# Altium PCB ArduinoFOC.PcbDoc
Units mm, origin at the board's own origin, x right, y up, seen from the top; angles counter-clockwise.
Board outline 68.05 x 53.25 mm, 2 copper layers (Top Layer, Bottom Layer), stack 1.671 mm thick; 45 components, 51 nets, 169 pads, 62 vias.
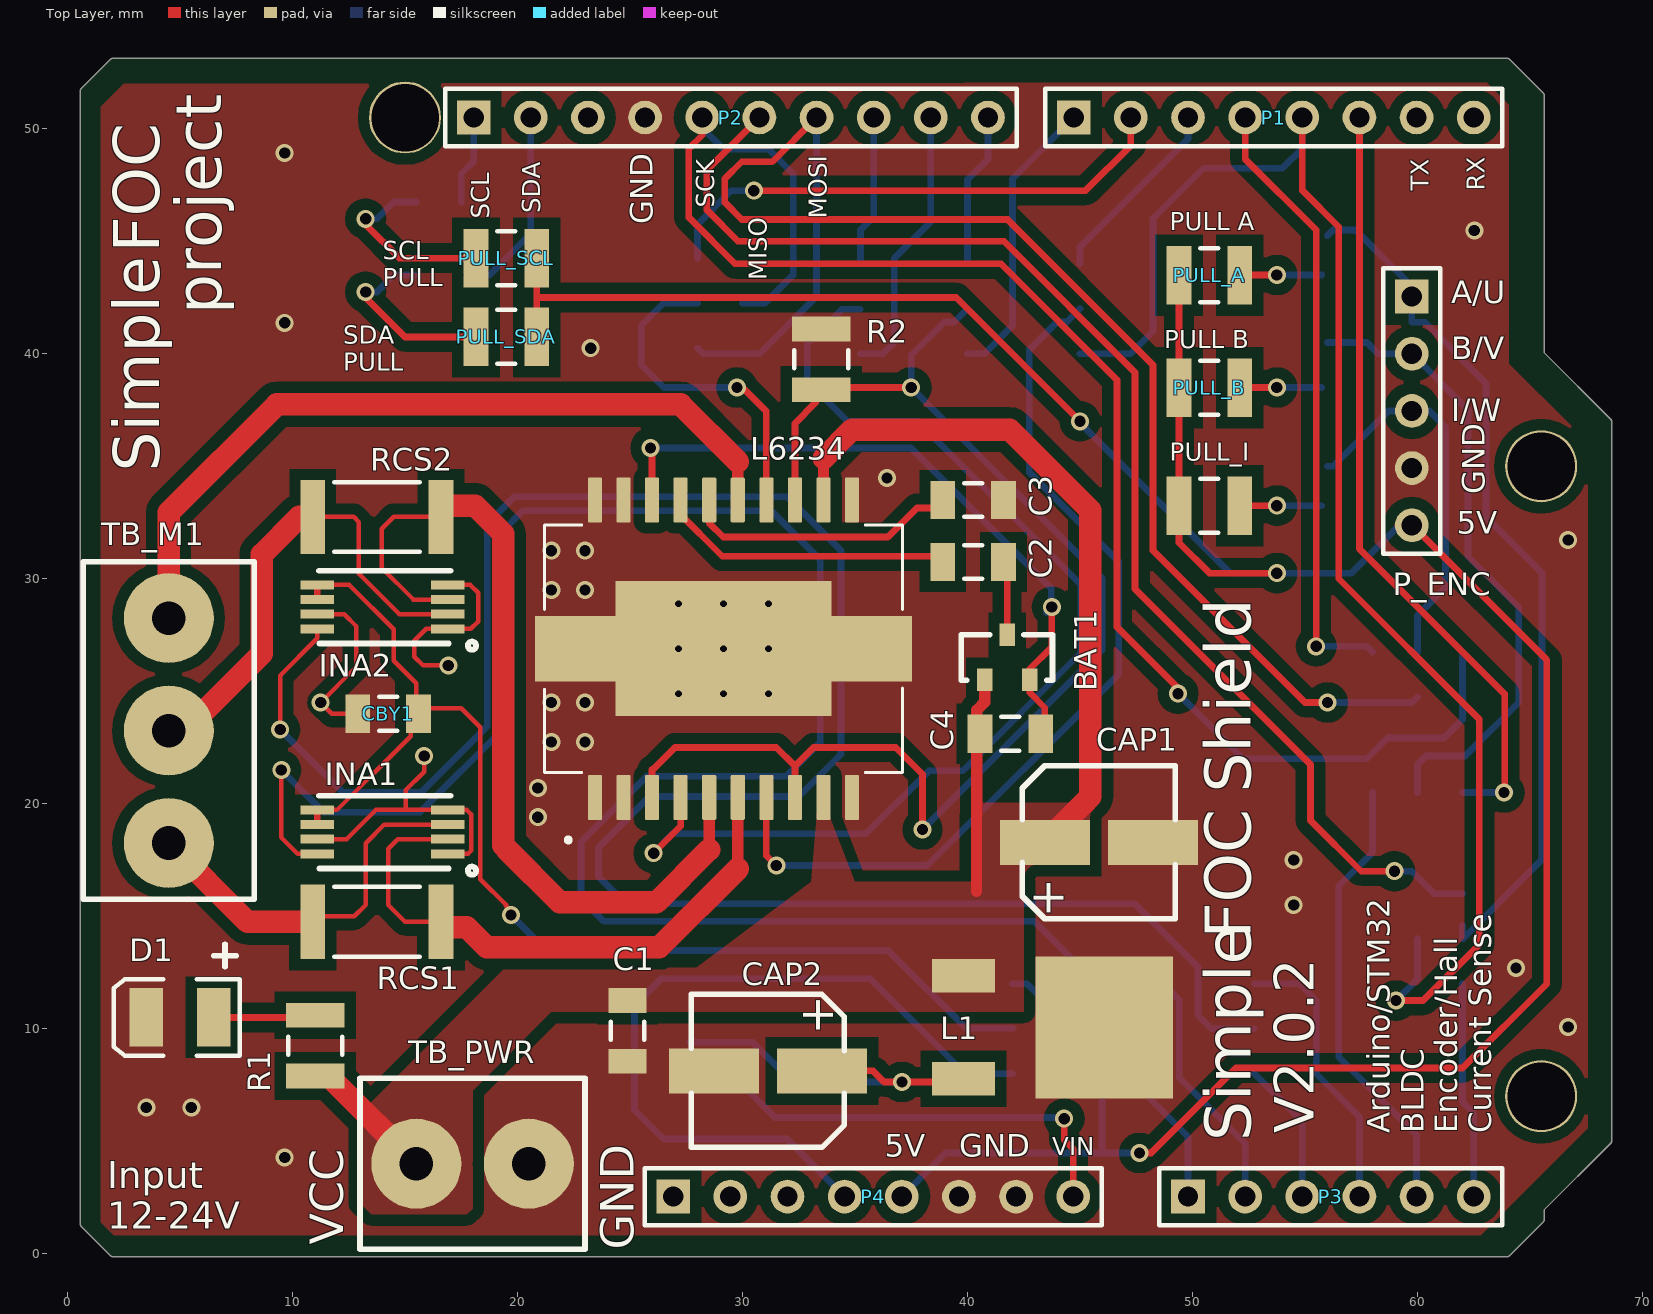
[diagram p0: Top Layer view]
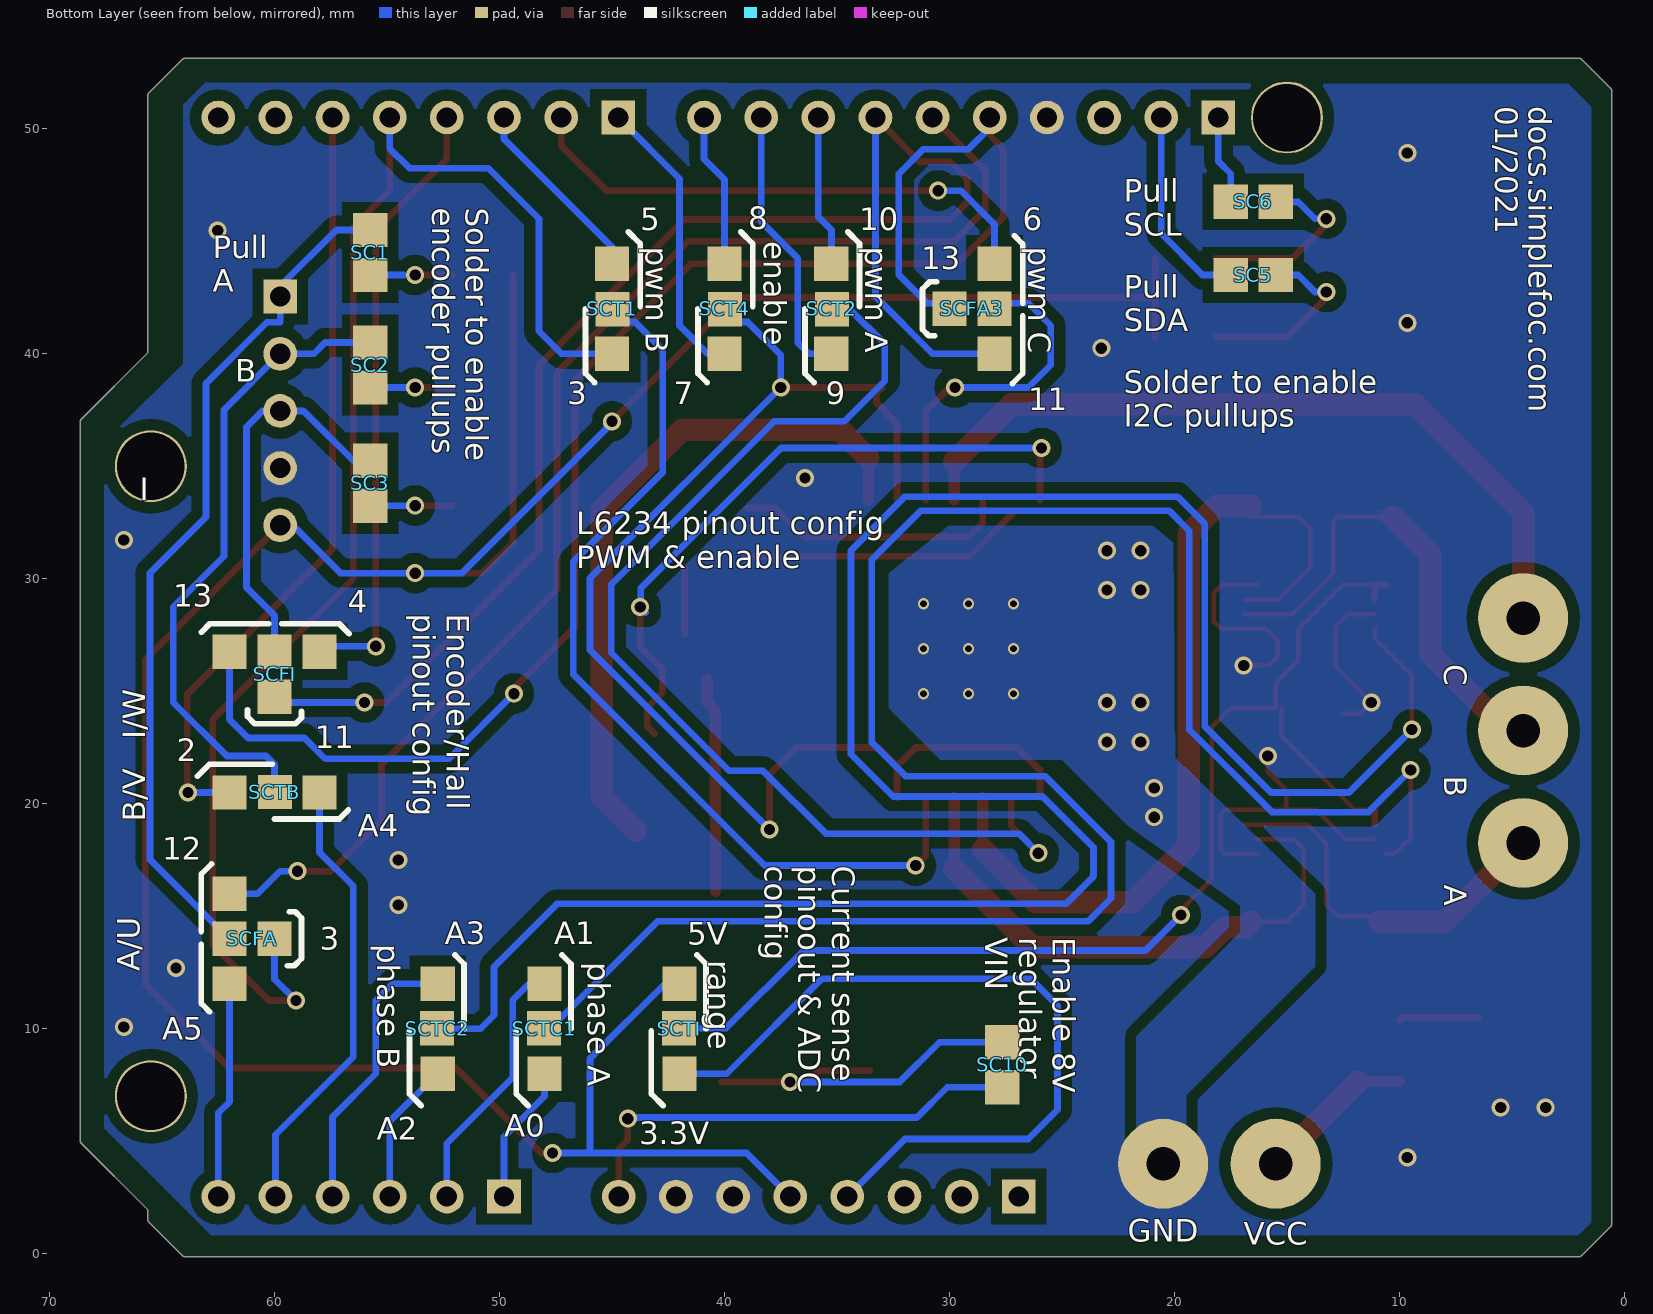
[diagram p1: Bottom Layer view, seen from below]

## Layer stack, top to bottom
Top Solder: solder mask 0.0102, Solder Resist, Dk 3.5
Top Layer: signal copper 0.0356
Dielectric 1: dielectric 1.6, FR-4, Dk 4.8
Bottom Layer: signal copper 0.0356
Bottom Solder: solder mask 0.0102, Solder Resist, Dk 3.5

## Board outline
0.785,1.035 cw(c0.875,1.125) 0.784,1.035 0.61,1.21 1.91,-0.09 ccw(c2,0) 2,-0.127 64,-0.127 ccw(c64,0) 64.09,-0.09 65.59,1.41 ccw(c65.5,1.5) 65.627,1.5 65.627,1.947 68.59,4.91 68.59,4.909 ccw(c68.5,5) 68.627,5 68.627,37 ccw(c68.5,37) 68.59,37.091 68.59,37.09 65.627,40.053 65.627,51.5 ccw(c65.5,51.5) 65.59,51.59 64.09,53.09 ccw(c64,53) 64,53.127 2,53.127 ccw(c2,53) 1.909,53.089 1.91,53.09 0.61,51.79 ccw(c0.7,51.7) 0.573,51.7 0.573,1.3 ccw(c0.7,1.3)

## Design rules (kind name [scope] priority, off if disabled: settings)
Clearance [All] p1: gap=0.5 ignorepadtopadclearanceinfootprint=FALSE except(0.2: Arc-Arc Arc-Track Arc-SMDPad Track-Track Track-SMDPad SMDPad-SMDPad)
ComponentClearance [InComponent('P_MOT') vs InComponent('TB_M1')] p1: gap=0.254 collisioncheckmode=3 verticalgap=0.254 showdistances=FALSE
NetsToIgnore [All] p1:
PolygonConnect PolygonConnect_2 [InNet('VCC')] p1: thpad.connectstyle=Direct thpad.reliefconductorwidth=0.254 thpad.reliefentries=4 thpad.polygonreliefangle="90 Angle" thpad.airgapwidth=0.254 smdpad.connectstyle=Direct smdpad.reliefconductorwidth=0.254 smdpad.reliefentries=4 smdpad.polygonreliefangle="90 Angle" smdpad.airgapwidth=0.254 via.connectstyle=Relief via.reliefconductorwidth=0.254 via.reliefentries=4 via.polygonreliefangle="90 Angle" via.airgapwidth=0.254
PolygonConnect PolygonConnect_1 [InNet('GND')] p2: connectstyle=Direct reliefconductorwidth=0.254 reliefentries=4 polygonreliefangle="90 Angle" airgapwidth=0.254
PolygonConnect [All] p3: connectstyle=Relief reliefconductorwidth=0.254 reliefentries=4 polygonreliefangle="90 Angle" airgapwidth=0.254
RoutingVias [All] p1: holewidth=0.5 width=0.8 viastyle="Through Hole" minholewidth=0.3 minwidth=0.5 maxholewidth=0.711 maxwidth=1.27
SolderMaskExpansion [All] p1: expansion=0.102
UnpouredPolygon [All] p1: allowunpoured=TRUE allowshelved=TRUE
Width Mot_line [InNetClass('Mot')] p1: maxlimit=1 minlimit=0.1 preferedwidth=0.2 minimp=50.000000 maximp=50.000000 favimp=50.000000
Width PWR_line [InNet('VCC')] p2: maxlimit=1 minlimit=0.2 preferedwidth=0.5 minimp=50.000000 maximp=50.000000 favimp=50.000000
Width GND_line [InNet('GND')] p3: maxlimit=1.2 minlimit=0.1 preferedwidth=0.2 minimp=50.000000 maximp=50.000000 favimp=50.000000
Width [All] p4: maxlimit=1 minlimit=0.2 preferedwidth=0.3 minimp=50.000000 maximp=50.000000 favimp=50.000000
28 further rules are at their usual default settings.

## Classes and differential pairs
net class Mot: NetINA1_2 NetINA1_3 NetINA2_2 NetINA2_3 NetL6234_15

## Components (designator, comment, footprint, x,y, rotation, side; value= is the part's Value field where it differs from the comment)
BAT1 "BAT54S" BAT54s 42.766,27.516 r270 top
C1 "Cap Semi" C1206 24.892,9.906 r270 top value=100nF
C2 "Cap Semi" C1206 40.25,30.75 r0 top value=10nF
C3 "Cap Semi" C1206 40.25,33.5 r0 top value=1uF
C4 "Cap Semi" C1206 41.91,23.114 r0 top value=220nF
CAP1 "EEH-ZA1E101XP" EEH-ZA1E101XP 49.234,21.688 r180 top
CAP2 "VZH100M1HTR-0606" EEH-ZA1E101XP 27.728,4.728 r0 top
CBY1 "Cap Semi" C1206 14.25,24 r0 top value=0.1uF
D1 "LED3" 3.5X2.8X1.9 5,10.5 r180 top
INA1 "INA240" INA240 14,18.75 r90 top
INA2 "INA240" INA240 14,28.75 r90 top
L1 "l7805" L7805 43.475,10.2 r0 top
L6234 "L6234PD013TR" SOIC127P1420X360-21N 29.155,26.89 r0 top
P1 "Header 8" HDR1X8 44.72,50.5 r0 top locked
P2 "Header 10" HDR1X10 18.05,50.5 r0 top
P3 "Header 6" HDR1X6 49.8,2.54 r0 top locked
P4 "Header 8" HDR1X8 26.92,2.54 r0 top locked
P_ENC "Header 5" HDR1X5 59.75,42.54 r270 top
PULL_A "Res3" 14-1210 50.75,43.5 r0 top value=3.3K
PULL_B "Res3" 14-1210 50.75,38.5 r0 top value=3.3K
PULL_I "Res3" 14-1210 50.75,33.25 r0 top value=3.3K
PULL_SCL "Res3" 14-1210 19.5,44.25 r180 top value=4.7K
PULL_SDA "Res3" 14-1210 19.5,40.75 r180 top value=4.7K
R1 "Res3" 14-1210 11,9.25 r270 top value=750Ohm
R2 "Res3" 14-1210 33.5,39.75 r270 top value=4.7K
RCS1 "Res3" RESC6332 13.75,14.75 r180 top value=10mOhm
RCS2 "Res3" RESC6332 13.75,32.75 r180 top value=10mOhm
SC1 "solder_connection" solder_connection 55.75,45.5 r270 bottom
SC2 "solder_connection" solder_connection 55.75,40.5 r270 bottom
SC3 "solder_connection" solder_connection 55.75,35.25 r270 bottom
SC5 "solder_connection" solder_connection 17.5,43.5 r180 bottom
SC6 "solder_connection" solder_connection 17.5,46.75 r180 bottom
SC10 "solder_connection" solder_connection 27.65,9.4 r270 bottom
SCFA "solder_connection_four" solder_connection_four 62,14 r90 bottom
SCFA3 "solder_connection_four" solder_connection_four 28,42 r270 bottom
SCFI "solder_connection_four" solder_connection_four 60,26.75 r180 bottom
SCT1 "solder_connection_tripple" solder_connection_tripple 45,42 r270 bottom
SCT2 "solder_connection_tripple" solder_connection_tripple 35.25,42 r270 bottom
SCT4 "solder_connection_tripple" solder_connection_tripple 40,42 r270 bottom
SCTB "solder_connection_tripple" solder_connection_tripple 60,20.5 r180 bottom
SCTC1 "solder_connection_tripple" solder_connection_tripple 48,10 r90 bottom
SCTC2 "solder_connection_tripple" solder_connection_tripple 52.75,10 r90 bottom
SCTI "3.3 or 5 v" solder_connection_tripple 42,10 r90 bottom
TB_M1 "TB002-500-03BE" TB002-500-03BE 4.5,18.25 r90 top
TB_PWR "TB002-500-02BE" TB002-500-02BE 20.5,4 r180 top

## Footprints (in the part's own frame and the unit in brackets; to place one, negate y for a bottom-side part, rotate by r counter-clockwise, add the part's x,y. Pads: shape width x height; smd on the part's side, far side on the other; paste and mask are expansions set on the pad)
3.5X2.8X1.9 [mm] "SM LED; 2 C-Bend Leads; Body 3.5 x 2.8 x 1.9 mm, inc leads (LxWxH typ)"
  rect 1.5x2.6 smd: 1(-1.5,0) 2(1.5,0)
  silkscreen extent -2.65,-1.7 2.95,1.7
14-1210 [mm] "Chip Resistor, Body 3.2x2.5mm, IPC High Density"
  rect 1.1x2.6 smd: 1(-1.35,0) 2(1.35,0)
  silkscreen extent -0.4,-1.2 0.4,1.2, body extent -1.68,-1.32 1.68,1.32, height 0.9
BAT54s [mm]
  rect 1x0.7 smd: 1(2,-2) 2(2,0) 3(0,-1)
  silkscreen extent 0,-3.05 2.03,1.02, body extent -0.46,-2.48 2.46,0.44, height 1
C1206 [mm] "Chip Capacitor, Body 3.2x1.6mm, IPC High Density"
  rect 1.1x1.7 smd: 1(-1.35,0) 2(1.35,0)
  silkscreen extent -0.4,-0.75 0.4,0.75, body extent -1.7,-0.9 1.7,0.9, height 1.3
EEH-ZA1E101XP [mm]
  rect 4x2 smd: 1(1,3.4) 2(5.8,3.4)
  silkscreen extent 0,0 6.8,6.8, body extent -0.3,0.2 7,6.8, height 7.7
HDR1X5 [mm] "Connector; Header; 5 Position"
  rect 1.5x1.5 hole 0.9: 1(0,0)
  round 1.5 hole 0.9: 2(2.54,0) 3(5.08,0) 4(7.62,0) 5(10.16,0)
  silkscreen extent -1.27,-1.27 11.43,1.27
HDR1X6 [mm] "Connector; Header; 6 Position"
  rect 1.5x1.5 hole 0.9: 1(0,0)
  round 1.5 hole 0.9: 2(2.54,0) 3(5.08,0) 4(7.62,0) 5(10.16,0) 6(12.7,0)
  silkscreen extent -1.27,-1.27 13.97,1.27
HDR1X8 [mm] "Connector; Header; 8 Position"
  rect 1.5x1.5 hole 0.9: 1(0,0)
  round 1.5 hole 0.9: 2(2.54,0) 3(5.08,0) 4(7.62,0) 5(10.16,0) 6(12.7,0) 7(15.24,0) 8(17.78,0)
  silkscreen extent -1.27,-1.27 19.05,1.27
HDR1X10 [mm] "Connector; Header; 10 Position"
  rect 1.5x1.5 hole 0.9: 1(0,0)
  round 1.5 hole 0.9: 2(2.54,0) 3(5.08,0) 4(7.62,0) 5(10.16,0) 6(12.7,0) 7(15.24,0) 8(17.78,0) 9(20.32,0) 10(22.86,0)
  silkscreen extent -1.27,-1.27 24.13,1.27
INA240 [mm]
  rect 0.4x1.5 smd mask+0.05: 1(-0.975,-2.9) 2(-0.325,-2.9) 3(0.325,-2.9) 4(0.975,-2.9) 5(0.975,2.9) 6(0.325,2.9) 7(-0.325,2.9) 8(-0.975,2.9)
  silkscreen extent -1.91,-4.16 1.6,2.83, body extent -1.5,-3.3 1.5,3.3, height 1.2
L7805 [mm] "l7805"
  rect 2.8x1.5 smd: 1(-3.65,2.15) 3(-3.65,-2.422)
  rect 6.1x6.3 smd: 2(2.6,-0.15)
  body extent -4.66,-3.3 5.06,3.1, height 2.3
RESC6332 [mm] "Chip Resistor, Body 6.3x3.2mm, IPC High Density"
  rect 1.1x3.3 smd: 1(-2.85,0) 2(2.85,0)
  silkscreen extent -1.9,-1.55 1.9,1.55, body extent -3.22,-1.68 3.22,1.68, height 0.9
SOIC127P1420X360-21N [mm]
  rrect16% 0.63x1.99 smd: 1(-5.715,-6.61) 2(-4.445,-6.61) 3(-3.175,-6.61) 4(-1.905,-6.61) 5(-0.635,-6.61) 6(0.635,-6.61) 7(1.905,-6.61) 8(3.175,-6.61) 9(4.445,-6.61) 10(5.715,-6.61) 11(5.715,6.61) 12(4.445,6.61) 13(3.175,6.61) 14(1.905,6.61) 15(0.635,6.61) 16(-0.635,6.61) 17(-1.905,6.61) 18(-3.175,6.61) 19(-4.445,6.61) 20(-5.715,6.61)
  rect 9.6x6 smd paste-6: 21(0,0)
  rect 4x2.9 smd paste-3: 22(-6.375,0) 23(6.375,0)
  silkscreen extent -7.95,-8.6 7.95,5.5, body extent -8.26,-7.73 7.8,8.27, height 3.5
solder_connection [mil]
  rect 60x60 smd: 1(0,0) 2(78.74,0)
solder_connection_four [mil]
  rect 60x60 smd: 1(0,0) 2(78.74,0) 3(-78.74,0) 4(0,-78.74)
  silkscreen extent -128,-126 131,49
solder_connection_tripple [mil]
  rect 60x60 smd: 1(0.98,0.98) 2(78.74,0) 3(-78.74,0)
  Top Layer region: -28.54,34.45
  silkscreen extent -135,-46 129,49
TB002-500-02BE [mm] "TB002-500-02BE"
  round 4 hole 1.5: 1(0,0) 2(5,0)
  silkscreen extent -2.5,-3.8 7.5,3.8, body extent -2.5,-4.4 7.5,4.6, height 13.55
TB002-500-03BE [mm] "TB002-500-03BE"
  round 4 hole 1.5: 1(0,0) 2(5,0) 3(10,0)
  Top Layer lines w0.254: 0,0 0,-0.08
  silkscreen extent -2.5,-3.8 12.5,3.8, body extent -2.57,-5.2 13.17,4.6, height 13.8

## Part data
BAT1: Supplier Part Number 1=512-BAT54S, Supplier 1=Mouser
C1 C2 C3 C4 CBY1: "Capacitor (Semiconductor SIM Model)", LatestRevisionDate=29-May-2009, LatestRevisionNote="IPC-7351 Footprint Added.", PackageDescription="Chip Capacitor", PackageReference=C1206, Published=8-Jun-2000, Publisher="Altium Limited"
CAP1: Supplier Part Number 1=667-EEH-ZA1E101XP, Supplier 1=Mouser
CAP2: library part EEH-ZA1E101XP, Supplier Part Number 1=667-EEH-ZA1E101XP, Supplier 1=Mouser
D1: "Typical BLUE SiC LED", DatasheetVersion=16-Apr-2002, LatestRevisionDate=17-Dec-2003, LatestRevisionNote="PCB Footprint replaced.", PackageDescription="SM LED; 2 C-Bend Leads; Body 3.5 x 2.8 x 1.9 mm, inc leads (LxWxH typ)", PackageReference=3.5X2.8X1.9, PackageVersion=16-Apr-2002, Published=8-Jun-2000, Publisher="Altium Limited"
INA1 INA2: Supplier Part Number 1=595-INA240A2PWR, Supplier 1=Mouser
L6234: "Motor Driver BiCDMOS Parallel PowerSO-20", Package="SO-20 STMicroelectronics", Digi-Key_Part_Number=497-5352-1-ND, Digi-Key_Purchase_URL=https://www.digikey.com/product-detail/en/stmicroelectronics/L6234PD013TR/497-5352-1-ND/1154483?utm_source=snapeda&utm_medium=aggregator&utm_campaign=symbol, MF=STMicroelectronics, MP=L6234PD013TR, SnapEDA_Link=https://www.snapeda.com/parts/L6234PD013TR/STMicroelectronics/view-part/75337/?ref=snap
P1 P4: "Header, 8-Pin", LatestRevisionDate=17-Jul-2002, LatestRevisionNote="Re-released for DXP Platform.", Publisher="Altium Limited"
P2: "Header, 10-Pin", LatestRevisionDate=17-Jul-2002, LatestRevisionNote="Re-released for DXP Platform.", Publisher="Altium Limited"
P3: "Header, 6-Pin", LatestRevisionDate=17-Jul-2002, LatestRevisionNote="Re-released for DXP Platform.", Publisher="Altium Limited"
P_ENC: "Header, 5-Pin", LatestRevisionDate=17-Jul-2002, LatestRevisionNote="Re-released for DXP Platform.", Publisher="Altium Limited"
PULL_A PULL_B PULL_I PULL_SCL PULL_SDA R1 R2 RCS1 RCS2: "Resistor", LatestRevisionDate=29-May-2009, LatestRevisionNote="IPC-7351 Footprint Added.", PackageDescription="Chip Resistor", PackageReference=J1-0603, Published=8-Jun-2000, Publisher="Altium Limited"
SCTI: library part solder_connection_tripple
TB_M1: Supplier Part Number 1=490-TB002-500-03BE, Supplier 1=Mouser
TB_PWR: Supplier Part Number 1=490-TB002-500-02BE, Supplier 1=Mouser

## Free pads (board coordinates)
  round 3.2 hole 3: T1(15,50.5) T2(65.5,35) T3(65.5,7)

## Via types
v1: diameter 0.8, hole 0.5, Top Layer to Bottom Layer, 53 vias
v2: diameter 0.5, hole 0.3, Top Layer to Bottom Layer, 9 vias

## Nets (pads, with @x,y where several pads share a name; then routed paths per layer and width w, separated by ;. In a path a pad name is that pad's centre, name@x,y a point inside that pad or via, vN(x,y) a via of type N, cw(c..) or ccw(c..) an arc to the next point about the centre after c; other vN are vias at no path point)
3.3V: P4.4 SCTI.3 | length 34.6
  Bottom Layer w0.3: P4.4 31.98,5.1 26.5,5.1 25.2,6.4 25.2,11.025 26.4,12.225 35.675,12.225 39.9,8 SCTI.3
+5: P4.5 P_ENC.5 PULL_A.1 PULL_B.1 PULL_I.1 PULL_SCL.1 PULL_SDA.1 SCTI.2 | length 130.7
  Top Layer w0.3: PULL_SDA.1 20.85,42.5 ; PULL_SCL.1 20.85,42.5 ; v1(45,37) 39.5,42.5 20.85,42.5 ; v1(47.65,4.475) 48.163,4.475 51.938,8.25 62,8.25 65.75,12 65.75,26.38 P_ENC.5 P_ENC.5@59.13,32.38 ; PULL_A.1 PULL_B.1 PULL_I.1 49.4,31.6 50.75,30.25 v1(53.75,30.25)
  Bottom Layer w0.3: P4.5 39.015,4.475 46,4.475 ; SCTI.2 42.65,12 45.975,8.675 45.975,4.5 46,4.475 ; v1@45.25,37 45.25,36.675 51.675,30.25 v1(53.75,30.25) 57.075,30.25 59.205,32.38 P_ENC.5 ; v1(47.65,4.475) 46,4.475
GND: C1.2 C3.2 CAP1.1 CAP2.1 CBY1.1 D1.2 INA1.1 INA1.4 INA1.7 INA2.1 INA2.4 INA2.7 L1.2 L6234.1 L6234.2 L6234.10 L6234.11 L6234.19 L6234.20 L6234.21 L6234.22 L6234.23 P2.4 P4.6 P4.7 P_ENC.4 R2.1 TB_PWR.1 | length 30.1
  Top Layer w0.2: INA2.7 12.3,28.425 12.825,27.9 12.825,26.075 v1(11.25,24.5) 11.75,24 CBY1.1@12.55,24 ; INA1.7@11.175,18.5 INA1.7 12.4,18.425 13.7,19.725 15.025,19.725 ; v1(15.85,22.125) 15.85,21.425 15.025,20.6 15.025,19.725 ; INA1.1@16.298,17.775 INA1.1 17.8,17.775 17.95,17.925 17.95,19.525 17.75,19.725 INA1.4 15.025,19.725 ; INA2.4@16.298,29.725 INA2.4 17.9,29.725 18.25,29.375 18.25,28.1 17.925,27.775 INA2.1 15.95,27.775 15.412,27.237 15.412,26.538 15.8,26.15 v1(16.925,26.15)
  other v1: 9.65,4.275 3.5,6.5 5.5,6.5 66.7,10.075 64.375,12.7 54.5,15.5 54.5,17.5 20.9,19.4 20.9,20.7 21.5,22.75 23,22.75 21.5,24.5 23,24.5 21.5,29.5 23,29.5 21.5,31.25 23,31.25 66.7,31.725 36.425,34.475 23.25,40.25 9.65,41.375 62.525,45.475 9.65,48.925
  other v2: 27.155,24.89 29.155,24.89 31.155,24.89 27.155,26.89 29.155,26.89 31.155,26.89 27.155,28.89 29.155,28.89 31.155,28.89
NetBAT1_2: BAT1.2 C4.2 L6234.18 | length 30.5
  Top Layer w0.3: v1(25.908,35.814) 25.836,35.814 25.98,35.67 L6234.18 ; C4.2@43.116,23.114 43.434,23.432 43.434,24.268 42.766,24.936 42.766,25.984 43.75,26.968 v1(43.75,28.75)
  Bottom Layer w0.3: v1(25.908,35.814) 37.486,35.814 43.725,29.575 v1@43.725,28.725 ; v1@43.5,28.5 v1@43.725,28.725 ; v1(43.75,28.75) v1@43.725,28.725
NetBAT1_3: BAT1.3 C2.2 | length 3
  Top Layer w0.3: BAT1.3 C2.2@41.766,30.5
NetC2_1: C2.1 L6234.17 | length 12.7
  Top Layer w0.3: L6234.17@27.15,32.95 29.1,31 C2.1@39.05,31
NetC3_1: C3.1 L6234.16 | length 12.3
  Top Layer w0.3: L6234.16 28.52,32.48 29.145,31.855 36.46,31.855 37.755,33.15 C3.1@39,33.15
NetCAP2_2: CAP2.2 L1.3 SC10.1 | length 17
  Top Layer w0.3: CAP2.2 35.805,8.128 36.298,7.635 v1(37.084,7.635) 40.117,7.635 L1.3@40.132,7.62
  Bottom Layer w0.3: SC10.1 30.45,9.4 32.215,7.635 v1(37.084,7.635)
NetCBY1_2: CBY1.2 INA1.5 INA1.6 INA2.5 INA2.6 SCTI.1 | length 53.2
  Top Layer w0.2: INA1.5 11.975,19.725 15.25,23 CBY1.2@15.25,24.25 ; INA2.5 12.525,29.725 14.5,27.75 14.5,26.35 15.5,25.35 15.5,24.25 17.5,24.25 18.35,23.4 18.35,16.65 19.5,15.5 19.475,15.475 19.709,15.241 v1(19.709,15.05)
  Top Layer w0.3: INA2.5@10.6,29.725 INA2.5 INA2.6 ; INA1.6 INA1.5
  Bottom Layer w0.3: v1(19.709,15.05) 21.284,13.475 36.475,13.475 39.925,10.025 SCTI.1
NetD1_1: D1.1 R1.1 | length 3.6
  Top Layer w0.3: D1.1 9.85,10.5 R1.1@10,10.35
NetINA1_2: INA1.2 L6234.6 RCS1.1 | length 25.8
  Top Layer w0.2: INA1.2@16.4,18.425 14.675,18.425 14.25,18 14.25,15.5 15,14.75 RCS1.1
  Top Layer w0.5: 29.79,17.106 L6234.6
  Top Layer w1: RCS1.1 16.85,14.5 17.75,14.5 18.626,13.624 26.307,13.624 29.79,17.106
NetINA1_3: INA1.3 RCS1.2 TB_M1.1 | length 17.3
  Top Layer w0.2: RCS1.2 11.15,15 12.75,15 13.25,15.5 13.25,18.25 14.075,19.075 INA1.3
  Top Layer w1: TB_M1.1 8,14.75 RCS1.2
NetINA1_8: INA1.8 SCTC1.1 | length 91.5
  Top Layer w0.2: v1(9.5,21.5) 9.5,18.5 10.225,17.775 INA1.8@10.6,17.775
  Bottom Layer w0.3: v1(9.5,21.5) 11.375,19.625 15.675,19.625 19.344,23.294 19.344,32.119 20.25,33.025 31.275,33.025 33.45,30.85 33.45,22.725 31.95,21.225 25.75,21.225 22.825,18.3 22.825,15.8 23.85,14.775 34.475,14.775 42.975,14.775 47.75,10 SCTC1.1@48,10.25
NetINA2_2: INA2.2 RCS2.2 TB_M1.2 | length 22.4
  Top Layer w0: RCS2.2@10.65,33 RCS2.2@11,33
  Top Layer w0.2: RCS2.2 12.716,32.75 12.954,32.512 12.954,30.226 14.755,28.425 INA2.2
  Top Layer w0.3: TB_M1.2 TB_M1.2@5.216,23.25 ; 10.3,32.75 RCS2.2
  Top Layer w1: TB_M1.2@5.216,23.25 8.636,26.67 8.636,31.086 10.3,32.75
NetINA2_3: INA2.3 L6234.5 RCS2.1 | length 39.5
  Top Layer w0.2: RCS2.1 14.494,32.75 13.97,32.226 13.97,30.48 15.375,29.075 INA2.3
  Top Layer w0.5: 28.52,17.958 L6234.5
  Top Layer w1: RCS2.1@16.6,33.25 18.119,33.25 19.375,31.994 19.375,18.15 20.075,17.45 ; 19.5,18 21.885,15.615 26.177,15.615 28.52,17.958
NetINA2_8: INA2.8 SCTC2.1 | length 99
  Top Layer w0.2: v1(9.45,23.3) 9.45,25.7 11.1,27.35 INA2.8
  Bottom Layer w0.3: v1(9.45,23.3) 12.25,20.5 15.71,20.5 18.65,23.44 18.65,32.425 19.875,33.65 31.975,33.65 34.375,31.25 34.375,22.2 32.5,20.325 25.875,20.325 23.6,18.05 23.6,16.775 24.825,15.55 47.45,15.55 50.25,12.75 50.25,10.6 50.85,10 SCTC2.1@52.75,10
NetL6234_3: L6234.3 L6234.8 L6234.13 R2.2 SCT4.1 | length 60.1
  Top Layer w0.3: L6234.3 25.98,21.48 ; 25.98,21.52 25.98,21.48 ; L6234.8 32.33,21.67 ; L6234.13 32.33,36.905 33.25,37.825 33.25,38.25 33,38.5 v1(37.5,38.5) v1@37.6,38.6 ; v1(38,18.855) 38,21.309 36.809,22.5 33.16,22.5 32.33,21.67 ; 25.98,21.48 27,22.5 31.5,22.5 32.33,21.67
  Bottom Layer w0.3: v1(38,18.855) 45.974,26.829 45.974,30.026 v1(37.5,38.5) 37.5,39.943 38.969,41.412 39.412,41.412 SCT4.1@40,42
NetL6234_4: L6234.4 SCT2.1 | length 49.2
  Top Layer w0.3: v1(26.05,17.8) 27.25,19 L6234.4
  Bottom Layer w0.3: v1(26.05,17.8) 26.919,18.669 35.494,18.669 38.288,21.462 39.787,21.462 45.035,26.71 45.035,29.74 37.775,37 34.675,37 32.875,38.8 32.875,40.425 34.425,41.975 SCT2.1
NetL6234_7: L6234.7 SCT1.1 | length 41
  Top Layer w0.3: L6234.7 31.06,17.69 v1(31.5,17.25)
  Bottom Layer w0.3: v1(31.5,17.25) 38.212,17.25 46.725,25.763 46.725,30.745 42.75,34.72 42.75,40.193 43.969,41.412 44.412,41.412 SCT1.1@45,42
NetL6234_14: L6234.14 SCFA3.1 | length 15
  Top Layer w0.3: v1(29.75,38.5) 30,38.5 31.06,37.44 L6234.14
  Bottom Layer w0.3: SCFA3.1@28,42.25 26.5,42.25 25.5,41.25 25.5,39.5 26.5,38.5 v1(29.75,38.5)
NetL6234_15: L6234.15 TB_M1.3 | length 35.1
  Top Layer w0.5: L6234.15 29.79,35.21
  Top Layer w1: TB_M1.3@4.75,28 TB_M1.3 4.5,32.948 9.302,37.75 27.25,37.75 29.79,35.21
NetP1_1: P1.1 SCT4.2 | length 12.9
  Bottom Layer w0.3: SCT4.2 40.75,40 42,41.25 42,47.78 P1.1
NetP1_2: P1.2 SCFA3.3 | length 23.5
  Top Layer w0.3: v1(30.5,47.25) 45.25,47.25 47.26,49.26 P1.2
  Bottom Layer w0.3: SCFA3.3@28,44.25 28,45.75 29.5,47.25 v1(30.5,47.25)
NetP1_3: P1.3 SCT1.3 | length 8.5
  Bottom Layer w0.3: SCT1.3 45,44.75 49.8,49.55 P1.3
NetP1_4: P1.4 SCFI.2 | length 27.2
  Top Layer w0.3: P1.4 52.34,48.66 55.5,45.5 v1@55.5,27.25
  Bottom Layer w0.3: v1(55.5,27) 57.75,27 SCFI.2
NetP1_5: P1.5 SCFA.4 SCT1.2 | length 65.8
  Top Layer w0.3: P1.5 54.88,47.251 56.5,45.631 56.5,30 62.75,23.75 62.75,13.75 60.25,11.25 v1(59.05,11.25)
  Bottom Layer w0.3: SCT1.2 47.25,40 48.25,41 48.25,46 50.5,48.25 54,48.25 54.88,49.13 P1.5 ; v1(59.05,11.25) 60,12.2 SCFA.4
NetP1_6: P1.6 SCTB.3 | length 35.2
  Top Layer w0.3: P1.6 57.42,31.33 63.875,24.875 63.875,20.7 v1@64.075,20.5
  Bottom Layer w0.3: SCTB.3 64.125,20.5 v1(63.85,20.5)
NetP2_1: P2.1 SC6.1 | length 4
  Bottom Layer w0.3: SC6.1 17.5,48 18.05,48.55 P2.1
NetP2_2: P2.2 SC5.1 | length 8.8
  Bottom Layer w0.3: SC5.1@17.75,43.5 18.75,43.5 20.59,45.34 P2.2
NetP2_5: P2.5 SCFA3.4 SCFI.3 | length 71.8
  Top Layer w0.3: P2.5@28.44,50.27 28.21,50.04 28.21,49.71 27.615,49.115 27.615,46.055 29.67,44 41.487,44 46.65,38.837 46.65,27.85 49.358,25.142 v1(49.358,24.892)
  Bottom Layer w0.3: P2.5 28.21,50.04 29.158,49.092 31.158,49.092 32.25,48 32.25,43.5 31,42.25 SCFA3.4@30,42.25 ; v1(49.358,24.892) 52.25,22 57.75,22 58.67,22.92 61.17,22.92 62,23.75 SCFI.3
NetP2_6: P2.6 SCFA.2 | length 58.6
  Top Layer w0.3: P2.6 28.415,48.165 28.415,46.386 29.801,45 41.619,45 47.45,39.169 47.45,29.55 55.25,21.75 55.25,19.25 57.5,17 v1@59.25,17
  Bottom Layer w0.3: v1(58.975,17) 59.75,17 60.75,16 SCFA.2
NetP2_7: P2.7 SCFA3.2 SCFI.4 | length 65.6
  Top Layer w0.3: P2.7 31.325,48.535 29.968,48.535 29.215,47.782 29.215,46.718 29.968,45.965 41.785,45.965 48.25,39.5 48.25,31.25 55,24.5 v1(56,24.5)
  Bottom Layer w0.3: SCFA3.2@28,40.25 28.25,40 30.75,40 33.29,42.54 P2.7 ; v1(56,24.5) 59.75,24.5 SCFI.4
NetP2_8: P2.8 SCT2.3 | length 6.7
  Bottom Layer w0.3: SCT2.3 35.25,45.5 35.83,46.08 P2.8
NetP2_9: P2.9 SCT2.2 | length 12.4
  Bottom Layer w0.3: SCT2.2 36.25,40 36.75,40.5 36.75,44.25 38.37,45.87 P2.9
NetP2_10: P2.10 SCT4.3 | length 6.9
  Bottom Layer w0.3: SCT4.3 40,47.75 40.91,48.66 P2.10
NetP3_1: P3.1 SCTC1.3 | length 6.5
  Bottom Layer w0.3: SCTC1.3@48,8.25 48,7 49.8,5.2 P3.1
NetP3_2: P3.2 SCTC1.2 | length 11.9
  Bottom Layer w0.3: SCTC1.2@48,12.25 SCTC1.2 48.693,12 49.412,11.281 49.412,7.838 52.34,4.91 P3.2
NetP3_3: P3.3 SCTC2.3 | length 6.3
  Bottom Layer w0.3: SCTC2.3 54.88,5.87 P3.3
NetP3_4: P3.4 SCTC2.2 | length 12.6
  Bottom Layer w0.3: SCTC2.2 54.75,12 55.5,11.25 55.5,8 57.42,6.08 P3.4
NetP3_5: P3.5 SCTB.2 | length 20
  Bottom Layer w0.3: SCTB.2 58,17.842 56.5,16.342 56.5,8.75 59.96,5.29 P3.5
NetP3_6: P3.6 SCFA.3 | length 9.7
  Bottom Layer w0.3: SCFA.3 62,6.75 62.5,6.25 P3.6
NetP4_8: P4.8 SC10.2 | length 20.5
  Top Layer w0.3: v1(44.3,6) 44.3,5.05 44.7,4.65 P4.8
  Bottom Layer w0.3: SC10.2 30.1,7.4 31.45,6.05 v1@43.925,6.05
NetP_ENC_1: P_ENC.1 SC1.1 SCFA.1 | length 38.7
  Bottom Layer w0.3: SC1.1@56,45.25 56.25,45.5 57.25,45.5 59.75,43 P_ENC.1 59.75,41.4 60.33,41.4 63.05,38.68 63.05,32.75 65.535,30.265 65.535,17.516 62.019,14 SCFA.1 SCFA.1@62,14.588
NetP_ENC_2: P_ENC.2 SC2.1 SCTB.1 | length 28.3
  Bottom Layer w0.3: SC2.1@56,40.5 57.75,40.5 58.25,40 P_ENC.2 62.25,37.5 62.25,31 64.5,28.75 64.5,24.5 62.12,22.12 60.37,22.12 60,21.75 SCTB.1@60,20.5
NetP_ENC_3: P_ENC.3 SC3.1 SCFI.1 | length 17.1
  Bottom Layer w0.3: SC3.1@56,35 56.25,35 58.71,37.46 P_ENC.3 60.54,37.46 61.25,36.75 61.25,29.612 60,28.362 SCFI.1
NetPULL_A_2: PULL_A.2 SC1.2 | length 3.1
  Top Layer w0.3: PULL_A.2 v1(53.75,43.5)
  Bottom Layer w0.3: 54.25,43.5 SC1.2
NetPULL_B_2: PULL_B.2 SC2.2 | length 3.4
  Top Layer w0.3: PULL_B.2 v1(53.75,38.5)
  Bottom Layer w0.3: v1@54,38.5 SC2.2
NetPULL_I_2: PULL_I.2 SC3.2 | length 3.4
  Top Layer w0.3: PULL_I.2 v1(53.75,33.25)
  Bottom Layer w0.3: v1@54,33.25 SC3.2
NetPULL_SCL_2: PULL_SCL.2 SC6.2 | length 8.3
  Top Layer w0.3: v1(13.25,46) 13.25,45.75 14.75,44.25 PULL_SCL.2
  Bottom Layer w0.3: v1(13.25,46) 13.75,46 14.5,46.75 SC6.2
NetPULL_SDA_2: PULL_SDA.2 SC5.2 | length 8.4
  Top Layer w0.3: v1(13.25,42.75) 13.25,42.5 15,40.75 PULL_SDA.2
  Bottom Layer w0.3: v1(13.25,42.75) 13.75,42.75 14.5,43.5 SC5.2
VCC: BAT1.1 C1.1 C4.1 CAP1.2 L1.1 L6234.9 L6234.12 R1.2 TB_PWR.2 | length 47.5
  Top Layer w0.5: R1.2@10,7.65 R1.2@11.85,7.65 ; TB_PWR.2 TB_PWR.2@15.5,4.35 ; L6234.12 33.6,35.35 ; 40.4,16.1 40.4,19.5 40.416,19.516 40.416,24.166 40.766,24.516 BAT1.1
  Top Layer w1: R1.2@11.85,7.65 TB_PWR.2 ; 33.6,35.35 34.875,36.625 41.875,36.625 45.466,33.034 45.466,20.32 CAP1.2@43.942,18.796
pads on no net: P1.7 P1.8 P2.3 P4.1 P4.2 P4.3

## Polygon pours and split planes (outlines as drawn)
no net on Mechanical 1 (solid): 2.4,52.3
GND on Top Layer "Top Layer-No Net" (solid, remove dead copper, pour order 48): 2.5,52 1.47,50.97 1.47,1.402 2.061,0.811 62.811,0.811 63.061,1.061 67.575,5.575 67.575,36.048 64.061,39.561 64.061,51.061 63.061,52.061
VCC on Top Layer "Top Layer-VCC" (solid, pour order 66): 40.282,20.04 44.704,20.04 46.632,19.788 46.632,16.992 40.302,14.432 40.282,14.452
VCC on Top Layer "Top Layer-VCC 3" (solid, pour order 36): 17.75,1.75 18,2 18,7.25 21.5,10.75 29.493,10.75 42.5,10.75 42.5,16.539 35,16.539 33.75,19.75 33.333,19.658 33.049,16.539 27.94,12.7 19.45,12.7 13,6.25 13,2.25 13.5,1.75 13.75,1.75
no net on Top Layer "Top Layer-No Net 2" (solid, pour order 58): 32.004,13.716
no net on Top Layer "Top Layer-No Net 1" (solid, pour order 50): 12,18.75
VCC on Top Layer "Top Layer-VCC 4" (solid, pour order 44): 87.75,3
GND on Bottom Layer "Bottom Layer-No Net" (solid, remove dead copper, pour order 64): 2.5,52 1.47,50.97 1.47,1.402 2.061,0.811 62.811,0.811 63.061,1.061 67.575,5.575 67.575,36.048 64.061,39.561 64.061,51.061 63.061,52.061
GND on Bottom Layer "Bottom Layer-GND" (solid, pour order 38): 20.25,21.95 19.96,21.95 20.05,31.6 20.964,32.35 30.025,32.35 32.7,30.25 32.7,24.239 30.411,21.95
GND on Bottom Layer "Bottom Layer-GND 1" (solid, pour order 56): 25.593,22.543 20.844,22.675 19.96,22.04 13.75,16 13.75,12.775 19.475,7.05 19.475,3.85 21.7,3.85 21.7,9.675 17.087,14.287 17.087,15.475 22.1,19.05

## Silkscreen, mask and mechanical layers (free items; w line width, h text height)
Top Overlay:
  lines w0.254: 6.5,13.25 7.5,13.25 ; 7,12.75 7,13.75
  text "TX" at 60.5,47.25 h0.8 r90
  text "RX" at 63,47.25 h0.8 r90
  text "SCK" at 28.75,46.5 h0.8 r90
  text "SDA" at 21,46.25 h0.8 r90
  text "SCL" at 18.75,46 h0.8 r90
  text "MOSI" at 33.75,46 h0.8 r90
  text "GND" at 26,45.75 h1 r90
  text "PULL A" at 49,45.5 h0.8
  text "FOC" at 4.75,44.5 h3.5 r90
  text "MISO" at 31.085,43.262 h0.8 r90
  text "SCL / PULL" at 14,43 h0.8
  text "A/U" at 61.5,42.25 h1
  text "project" at 7.5,41.75 h3.5 r90
  text "PULL B" at 48.75,40.25 h0.8
  text "B/V" at 61.5,39.75 h1
  text "SDA / PULL" at 12.25,39.25 h0.8
  text "I/W" at 61.5,37 h1
  text "Simple" at 4.75,34.75 h3.5 r90
  text "GND" at 63,33.75 h1 r90
  text "5V" at 61.75,32 h1
  text "Shield" at 53.25,20.5 h3.5 r90
  text "FOC" at 53.25,14 h3.5 r90
  text "V2.0.2" at 55.975,5.35 h3 r90
  text "Arduino/STM32 / BLDC / Encoder/Hall / Current Sense" at 63.275,5.35 h1 r90
  text "Simple" at 53.25,5 h3.5 r90
  text "VIN" at 43.775,4.375 h0.8
  text "5V" at 36.322,4.318 h1
  text "GND" at 39.624,4.318 h1
  text "Input / 12-24V" at 1.766,1.107 h1.2
  text "VCC" at 12.25,0.4 h1.5 r90
  text "GND" at 25.175,0.175 h1.5 r90
Bottom Overlay:
  text "docs.simplefoc.com / 01/2021" at 5.75,51 h1 r90
  text "Solder to enable / encoder pullups" at 53,46.5 h1 r90
  text "8" at 38.938,45.542 h1
  text "6" at 26.75,45.5 h1
  text "10" at 34,45.5 h1
  text "5" at 43.75,45.5 h1
  text "Pull  / SCL" at 22.25,45.25 h1
  text "enable" at 38.25,45 h1 r90
  text "pwm C" at 26.5,44.75 h1 r90
  text "pwm A" at 33.75,44.75 h1 r90
  text "pwm B" at 43.5,44.75 h1 r90
  text "13" at 31.25,43.75 h1
  text "Pull  / A" at 62.75,42.75 h1
  text "Pull  / SDA" at 22.25,41 h1
  text "B" at 61.75,38.75 h1
  text "9" at 35.5,37.75 h1
  text "7" at 42.25,37.75 h1
  text "3" at 47,37.75 h1
  text "11" at 26.5,37.5 h1
  text "Solder to enable  / I2C pullups" at 22.25,36.75 h1
  text "I" at 66,33.5 h1
  text "L6234 pinout config  / PWM & enable" at 46.6,30.475 h1
  text "13" at 64.5,28.75 h1
  text "4" at 56.75,28.5 h1
  text "Encoder/Hall  / pinout config" at 53.848,28.448 h1 r90
  text "C" at 8,26.2 h1 r90
  text "I/W" at 65.75,22.86 h1 r270
  text "11" at 58.21,22.46 h1
  text "2" at 64.35,21.9 h1
  text "B" at 8,21.25 h1 r90
  text "B/V" at 65.75,19.19 h1 r270
  text "A4" at 56.3,18.525 h1
  text "12" at 65,17.5 h1
  text "Current sense / pinoout & ADC / config" at 38.212,17.25 h1 r90
  text "A" at 8,16.4 h1 r90
  text "Enable 8V / regulator  / VIN" at 28.4,14.075 h1 r90
  text "A1" at 47.575,13.75 h1
  text "A3" at 52.425,13.75 h1
  text "phase B" at 55.425,13.75 h1 r90
  text "5V" at 41.65,13.725 h1
  text "3" at 58,13.5 h1
  text "range" at 40.725,13.05 h1 r90
  text "phase A" at 46.075,12.95 h1 r90
  text "A/U" at 66,12.55 h1 r270
  text "A5" at 65,9.5 h1
  text "A0" at 49.8,5.2 h1
  text "A2" at 55.45,5.075 h1
  text "3.3V" at 43.8,4.875 h1
  text "GND" at 22.075,0.525 h1
  text "VCC" at 16.925,0.4 h1
Mechanical 1:
  lines w0.254: 0.875,1.125 2,0 ; 2,0 64,0 65.5,1.5 65.5,2 68.5,5 68.5,37 65.5,40 65.5,51.5 64,53 2,53 0.7,51.7 0.7,1.3 2,0

## Text inside footprints (layer, text, board x,y; h text height)
CAP1: Top Overlay "+" at 42.934,16.688 h1.52 r270
CAP2: Top Overlay "+" at 34.028,9.728 h1.52 r90